# Altium PCB TE0123.V2_Placa_2022-08-20.pcbdoc (part 1 of 2)
Units mil, origin at the board's own origin, x right, y up, seen from the top; angles counter-clockwise.
Board outline 7202.22 x 3893.5 mil, 2 copper layers (Top Layer, Bottom Layer); 145 components, 165 nets, 586 pads, 199 vias.
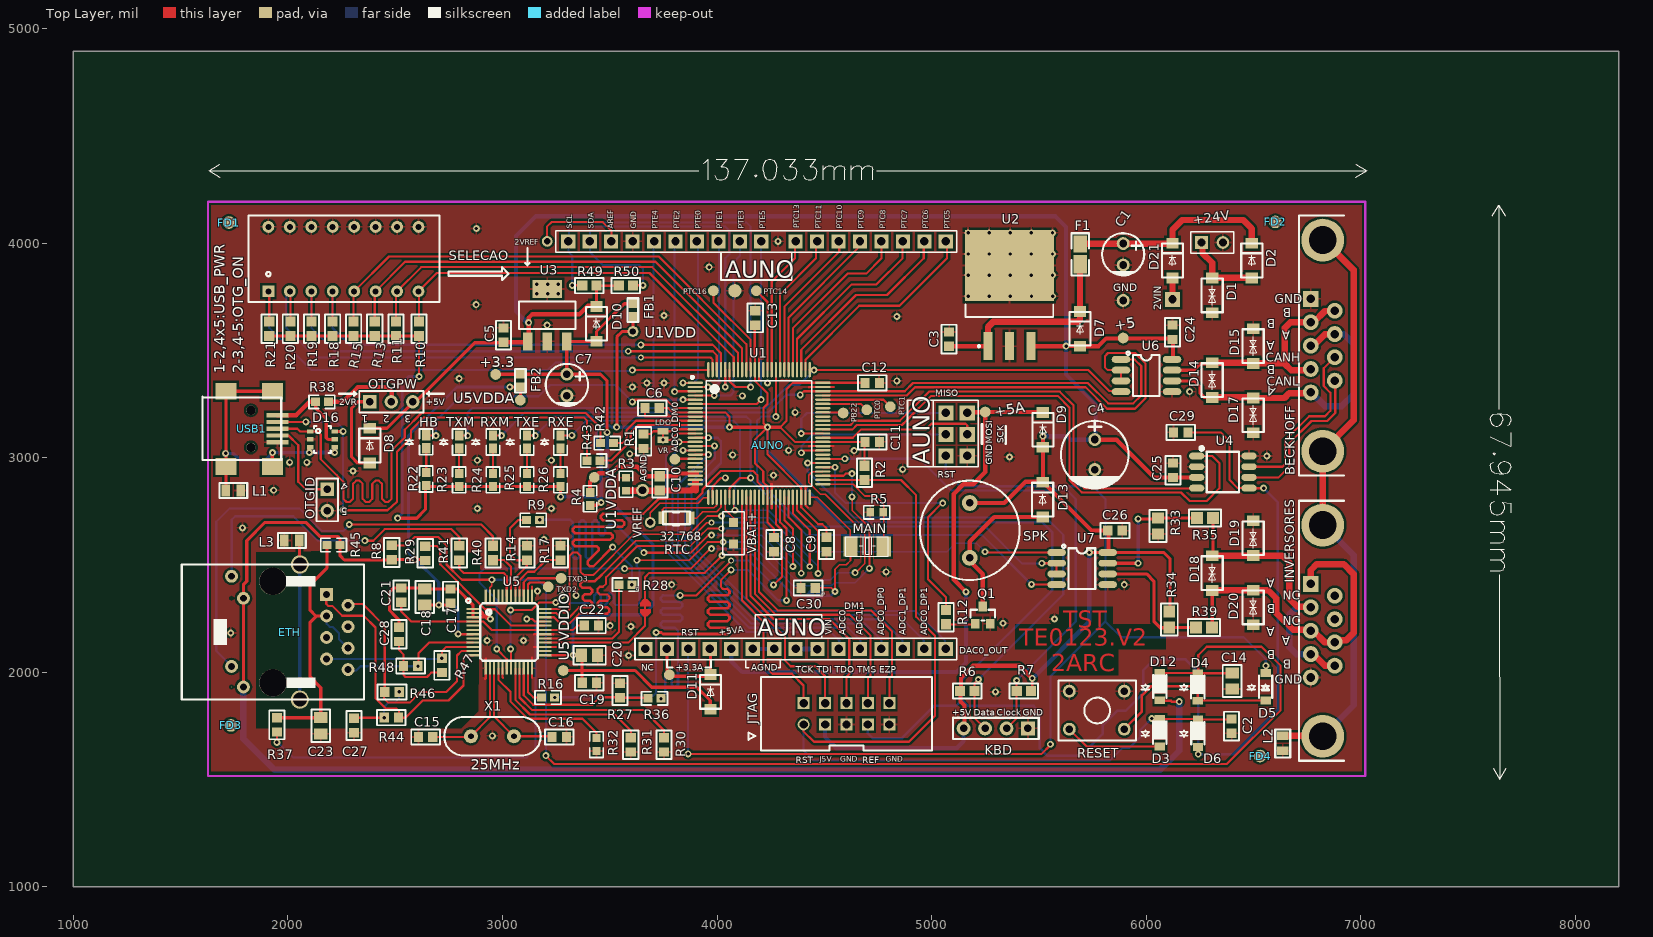
[diagram p0: Top Layer view]
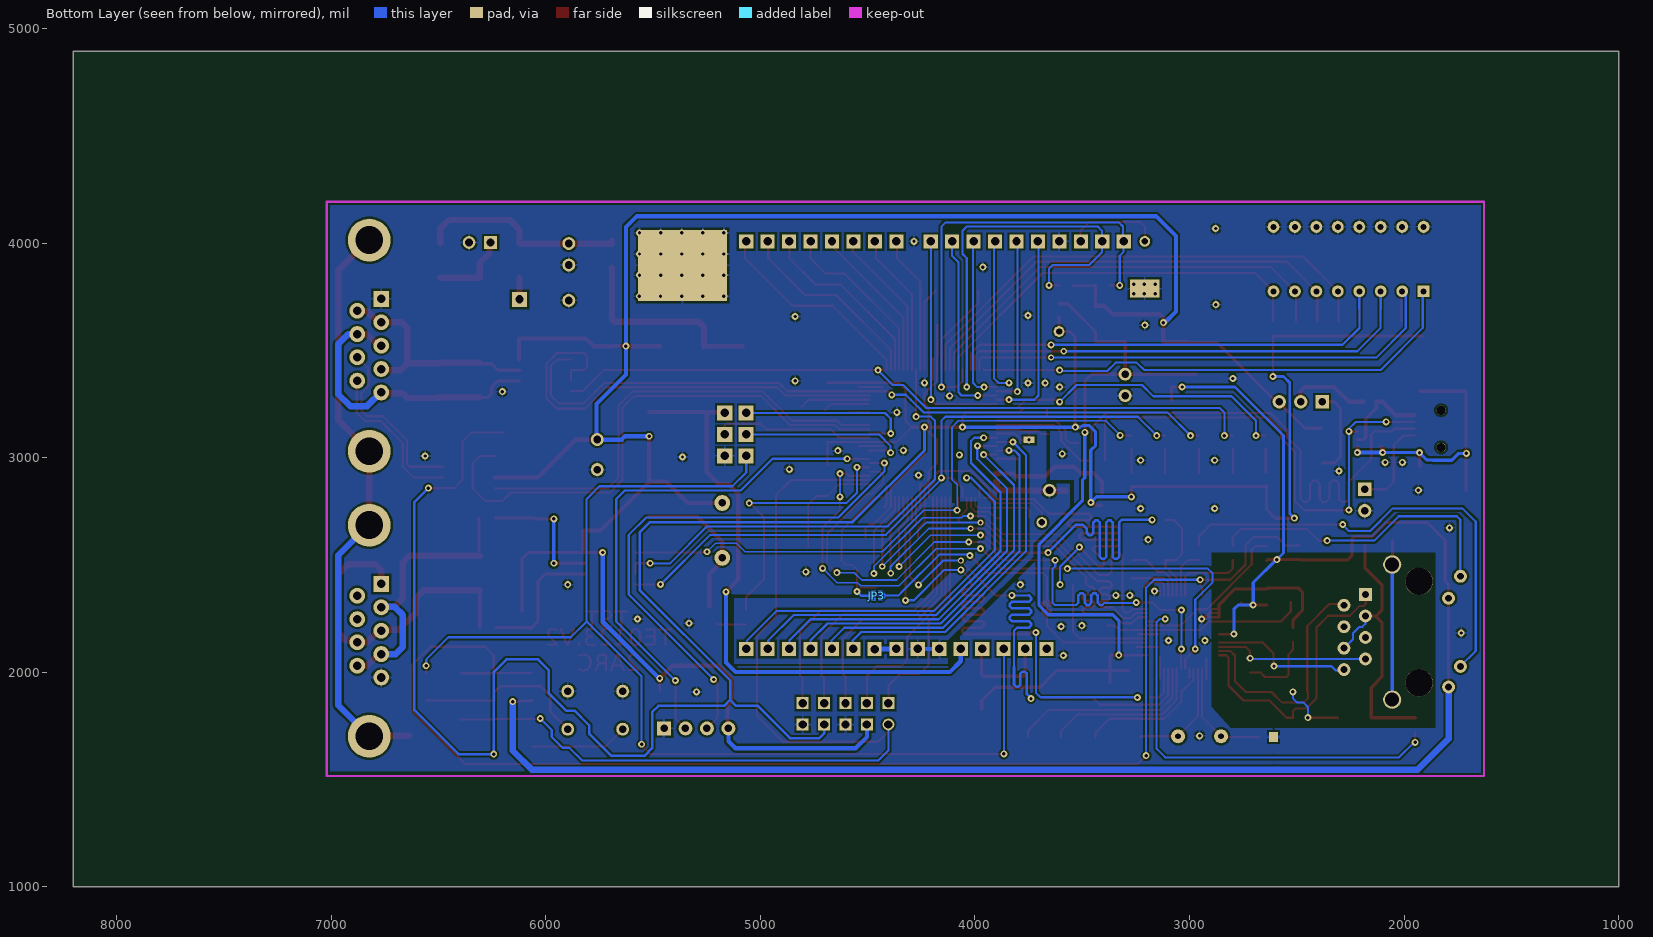
[diagram p1: Bottom Layer view, seen from below]

## Layer stack, top to bottom
Top Solder: solder mask 0.4, Solder Resist, Dk 3.5
Top Layer: signal copper 1.4
Dielectric1: dielectric 12.6, FR-4, Dk 4.8
Bottom Layer: signal copper 1.4
Bottom Solder: solder mask 0.4, Solder Resist, Dk 3.5

## Board outline
8202.22,1000 1000,1000 1000,4893.5 8202.22,4893.5

## Design rules (kind name [scope] priority, off if disabled: settings)
Clearance [All] p1: gap=10 ignorepadtopadclearanceinfootprint=FALSE except(0: Arc-Hole Track-Hole SMDPad-Hole THPad-Hole Via-Hole Fill-Hole Poly-Hole Region-Hole Text-Hole)
PolygonConnect [All] p1: connectstyle=Relief reliefconductorwidth=10 reliefentries=4 polygonreliefangle="90 Angle" airgapwidth=10
RoutingVias [All] p1: holewidth=28 width=50 viastyle="Through Hole" minholewidth=28 minwidth=50 maxholewidth=28 maxwidth=50
SolderMaskExpansion [All] p1: expansion=4 istentingtop=FALSE
Width [All] p1: maxlimit=10 minlimit=10 preferedwidth=10
30 further rules are at their usual default settings.

## Components (designator, comment, footprint, x,y, rotation, side; value= is the part's Value field where it differs from the comment)
+24V "1x2 Header" HDR1X2 6258,4003 r0 top
AUNO "ARDUINO UNO R3 WvB" "12ARDUINO UNO R3 NOSILK NOHOLES" 3966.3,3008.4 r0 top
BECKHOFF "DB9MALE" DB9_MALE 6823.3,3522.1 r270 top
C1 "10uF" CAP-D5.0XF2.0 5893,3948 r270 top
C2 "100nF" C0603#1 6398.5,1715.3 r90 top
C3 "100nF" C0603#1 5081.7,3586.1 r270 top
C4 "680uF/10V" CAP-D8.0XF3.5 5760.7,3014.3 r270 top
C5 "100nF" C0603#1 3004.9,3604.8 r270 top
C6 "100nF" C0603#1 3664.3,3230.8 r0 top
C7 "220uF/6.3V" CAP-D5.0XF2.0 3300,3339.1 r270 top
C8 "100nF" C0603#2 4264.7,2561.5 r90 top
C9 "100nF" C0603#2 4510.5,2561.6 r90 top
C10 "100nF" C0603#3 3733.2,2847 r90 top
C11 "100nF" C0603#2 4756.8,3073.4 r180 top
C12 "100nF" C0603#2 4756.8,3348.9 r180 top
C13 "100nF" C0603#2 4178,3618 r90 top
C14 "10uF" C0805 6400.5,1921.8 r90 top
C15 "33pF" C0603#4 2608,1698 r0 top
C16 "33pF" C0603#5 3298,1698 r180 top
C17 "100nF" C0603#6 2758,2388 r270 top
C18 "22uF" C0805 2638,2388 r270 top
C19 "100nF" C0603#2 3437.9,1950.6 r180 top
C20 "22uF" C0805 3368.9,2079 r0 top
C21 "100nF" C0603#6 2528,2393 r270 top
C22 "2.2uF" C0603#1 3447.8,2217.1 r180 top
C23 "10uF" C0805 2153,1713 r90 top
C24 "100nF" C0603#2 6123,3618 r270 top
C25 "100nF" C0603#1 6125.1,2974.8 r270 top
C26 "100nF" C0603#1 5888.6,2659.9 r180 top
C27 "100nF" C0603#2 2308,1718 r90 top
C28 "100nF" C0603#7 2518,2143 r90 top
C29 "100nF" C0603#6 6128,3118 r0 top
C30 "100nF" C0603#2 4391,2393 r0 top
D1 "P6SMB30CA" SMA(DO-214ACA)#1 6308,3753 r270 top
D2 "B160-13-F" SMA(DO-214AC)#1 6493,3923 r90 top
D3 "L1N4148WT1G" SOD-123 6063.6,1717.8 r270 top
D4 "L1N4148WT1G" SOD-123 6241.1,1931.3 r270 top
D5 "L1N4148WT1G" SOD-123 6557.2,1932.1 r270 top
D6 "L1N4148WT1G" SOD-123 6241.8,1715.6 r270 top
D7 "B160-13-F" SMA(DO-214AC)#1 5691.9,3604.8 r90 top
D8 "B160-13-F" SMA(DO-214AC)#2 2381.6,3060.4 r90 top
D9 "B160-13-F" SMA(DO-214AC)#2 5519,3134 r90 top
D10 "B160-13-F" SMA(DO-214AC)#1 3438,3628 r90 top
D11 "B160-13-F" SMA(DO-214AC)#1 3969.6,1912.2 r90 top
D12 "L1N4148WT1G" SOD-123 6064.2,1932.5 r270 top
D13 "B160-13-F" SMA(DO-214AC)#1 5518,2808 r90 top
D14 "B160-13-F" SMA(DO-214ACA)#2 6308,3358 r270 top
D15 "B160-13-F" SMA(DO-214ACA)#2 6498.9,3516.3 r270 top
D16 "NUP2201MR6T1G" SOT-23-6 2160.4,3085.2 r270 top
D17 "B160-13-F" SMA(DO-214ACA)#2 6498.9,3201.3 r90 top
D18 "B160-13-F" SMA(DO-214ACA)#2 6308,2458 r270 top
D19 "B160-13-F" SMA(DO-214ACA)#2 6498.9,2620.6 r270 top
D20 "B160-13-F" SMA(DO-214ACA)#2 6498.9,2305.6 r90 top
D21 "B160-13-F" SMA(DO-214AC)#1 6123,3923 r90 top
ETH "RB1-125BAG1A" RB1-125BAG1A 1930,2187 r270 top
F1 "0466.500.WR" 1206 5693,3948 r270 top
FB1 "120R" L0603 3608,3688 r270 top
FB2 "120R" L0603 3083.6,3358.8 r270 top
FD1 "FIDUCIAL" FIDUCIAL_1MM 1725,4096 r0 top
FD2 "FIDUCIAL" FIDUCIAL_1MM 6602,4099 r0 top
FD3 "FIDUCIAL" FIDUCIAL_1MM 1734,1752 r0 top
FD4 "FIDUCIAL" FIDUCIAL_1MM 6531,1609 r0 top
HB "LTST-C193KSKT-5A" 0603#1 2644.3,3103.3 r270 top
INVERSORES "DB9FEMALE" DB9 6823.3,2193.4 r270 top
JP1 "SOLDER JUMPER 2_PADS" "SOLDER JUMPER 2_PADS" 3666,2300 r90 top
JP3 "SOLDER JUMPER 2_PADS" "SOLDER JUMPER 2_PADS" 4457,2357 r0 bottom
JTAG "JTAG-PROG-CONNMOLEX" JTAG-10PIN-2.54MM-PTH 4603.3,1806.3 r0 top
KBD "2.54-1*4P_JX" H4-2.54 5299.3,1738 r270 top
L1 "330R" L0805#1 1745,2847 r180 top
L2 "330R" L0805#1 6636.7,1668.1 r270 top
L3 "330R" L0805#2 2018,2613 r0 top
MAIN "SMD-5032_2P" SMD-5032_2P 4699,2586 r0 top
OTGID "Header-Male-2.54_1x2" HDR-2X1/2.54#1 2183,2853 r0 top
OTGPW "Header-Male-2.54_1x3" HDR-3X1/2.54 2581.5,3260.3 r90 top
Q1 "S9013" Seeed-SOT-23 5239.1,2266.3 r0 top
R1 "10K" R0603#1 3658,3043 r90 top
R2 "10K" R0603#2 4687.4,2896.1 r90 top
R3 "0R" 0603#2 3575.7,2906 r270 top
R4 "0R" 0603#3 3408.6,2837.9 r270 top
R5 "0R" 0603#2 4715,2745 r0 top
R6 "10K" R0603#2 5199.7,1911.9 r180 top
R7 "10K" R0603#3 5396.5,1912 r0 top
R8 "10K" R0603#4 2483.9,2591.6 r270 top
R9 "33R" 0603#3 3113.2,2709.6 r0 top
R10 "10K" R0603#3 2611.1,3634.4 r270 top
R11 "10K" R0603#3 2503,3634.4 r270 top
R12 "1K" R0603#2 5068,2223 r90 top
R13 "10K" R0603#3 2404.6,3634.4 r270 top
R14 "1K" R0603#4 3114.5,2522 r90 top
R15 "10K" R0603#3 2306.1,3634.4 r270 top
R16 "33R" 0603#3 3241.7,1882.3 r180 top
R17 "1K" R0603#4 3270.6,2522.4 r90 top
R18 "10K" R0603#3 2208.1,3634.4 r270 top
R19 "10K" R0603#3 2109.3,3634.4 r270 top
R20 "10K" R0603#3 2010.9,3634.4 r270 top
R21 "10K" R0603#3 1912.4,3634.4 r270 top
R22 "2.2K" 0603#3 2644.4,2871 r90 top
R23 "2.2K" 0603#3 2797.9,2866.7 r90 top
R24 "4.7K" 0603#3 2955.6,2866.7 r90 top
R25 "2.2K" 0603#3 3113.8,2866.7 r90 top
R26 "4.7K" 0603#3 3270,2866.7 r90 top
R27 "1K" R0603#5 3548,1948 r270 top
R28 "33R" 0603#3 3543,2408 r0 top
R29 "4.7K" R0603#4 2640,2520.7 r90 top
R30 "1K" R0603#5 3753,1628 r90 top
R31 "1K" R0603#5 3598,1628 r90 top
R32 "6.49K" 0603#2 3438,1633 r90 top
R33 "470R" R0805#1 6056,2719 r270 top
R34 "470R" R0805#2 6108,2208 r90 top
R35 "27R" R0805#3 6311.9,2719.1 r180 top
R36 "33R" 0603#3 3738,1878 r180 top
R37 "1K" R0603#1 1948,1788 r270 top
R38 "0R" 0603#3 2187.9,3260.4 r180 top
R39 "27R" R0805#3 6308,2208 r180 top
R40 "220R" R0603#6 2956.2,2522.2 r90 top
R41 "220R" R0603#4 2798.5,2522 r90 top
R42 "33R" 0603#3 3458,3068 r0 top
R43 "33R" 0603#3 3395,2986 r0 top
R44 "49.9R" R0603#1 2448,1788 r0 top
R45 "0R" 0603#3 2183,2593 r0 top
R46 "49.9R" R0603#4 2518,1908 r180 top
R47 "49.9R" R0603#7 2718,1998 r90 top
R48 "49.9R" R0603#8 2538,2028 r0 top
R49 "10K" R0603#2 3438,3802 r180 top
R50 "10K" R0603#2 3608,3802 r180 top
RESET "6*6*12SMD Tactile Switch" "TACTILE SWITCH" 5642.3,1911.5 r0 top
RTC "SMD-3215_2P" SMD-3215_2P 3811,2719 r0 top
RXE "LTST-C193TGKT-5A" 0603#1 3270,3102.9 r270 top
RXM "LTST-C193TGKT-5A" 0603#1 2955.6,3102.9 r270 top
SELECAO "SW-DIP8" "DIP SWITCH 16" 1908.5,3775.7 r0 top
SPK "BUZZER" BUZZER-12MM-KIT 5178,2661 r90 top
TXE "LTST-C193KRKT-5A" 0603#1 3113.8,3102.9 r270 top
TXM "LTST-C193KRKT-5A" 0603#1 2797.9,3102.9 r270 top
U1 "MK64FN1M0VLL12" LQFP-100_14X14X05P 3959.6,3410 r0 top
U2 "LM2940S-5.0NOPB" TS3B 5358,3758 r0 top
U3 "LM2937IMP-3.3NOPB" SOT-223 3208,3658 r0 top
U4 "MCP2562-E/SN" SOP-8_150mil 6458,2858 r0 top
U5 "KSZ8081MLXIA" LQFP48 3029.9,2187.1 r0 top
U6 "MAX485ESA+T" SOIC-8_150mil 5908,3458 r0 top
U7 "MAX485ESA+T" SOIC-8_150mil 5608,2558 r0 top
USB1 "DS1104-B60S" MICRO-USB-13 1927.1,3134.5 r180 top
VBAT+ "Header-Male-2.54_1x2" HDR-2X1/2.54#2 4077,2698 r0 top
X1 "49S" HC49US 2952.9,1701.3 r180 top
? "" ? 4330.5,4343.8 r0 top
? "" ? 7652.11,2839.5 r0 top

## Footprints (in the part's own frame and the unit in brackets; to place one, negate y for a bottom-side part, rotate by r counter-clockwise, add the part's x,y. Pads: shape width x height; smd on the part's side, far side on the other; paste and mask are expansions set on the pad)
"12ARDUINO UNO R3 NOSILK NOHOLES" [mil]
  rect 66x66 hole 39.4: 1(1100,1000) 2(1000,1000) 3(900,1000) 4(800,1000) 5(700,1000) 6(600,1000) 7(500,1000) 8(400,1000) 9(240,1000) 10(140,1000) 11(40,1000) 12(-60,1000) 13(-160,1000) 14(-260,1000) 15(-360,1000) 16(-460,1000) 17(-560,1000) 18(-660,1000) 19(1100,-900) 20(1000,-900) 21(900,-900) 22(800,-900) 23(700,-900) 24(600,-900) 25(400,-900) 26(300,-900) 27(200,-900) 28(100,-900) 29(0,-900) 30(-100,-900) 31(-200,-900) 32(-300,-900)
  rect 70x70 hole 39.4: 33(1100,200) 34(1100,100) 35(1100,0) 36(1200,100) 37(1200,200) 38(1200,0)
0603#1 [mil]
  rect 48x38.58 smd: 1(-0.59,0) 2(60.01,0)
  silkscreen extent -31,-31 90,31
0603#2 [mil]
  rect 36.61x38.58 smd: 1(-0.59,0) 2(60.01,0)
  silkscreen extent -31,-31 90,31
0603#3 [mil]
  rect 42x38.58 smd: 1(-0.6,0) 2(60,0)
  silkscreen extent -31,-31 90,31
1206 [mm]
  rect 1.3x1.6 smd: 1(-1.6,0) 2(1.6,0)
  silkscreen extent -2.49,-1.04 2.49,1.04
BUZZER-12MM-KIT [mil]
  round 74 hole 35.4: +(128,0) -(-128,0)
  silkscreen extent -232,-232 232,232
C0603#1 [mil]
  rect 43.3x47.2 smd: 1(0,0) 2(66.9,0)
  silkscreen extent -33,-35 100,35
C0603#2 [mil]
  rect 43.3x47.2 smd: 1(-0.05,0) 2(66.85,0)
  silkscreen extent -34,-35 100,35
C0603#3 [mil]
  rect 48x47.2 smd: 1(-0.05,0) 2(66.85,0)
  silkscreen extent -34,-35 100,35
C0603#4 [mil]
  rect 43.3x47.2 smd: 1(0.15,-0.2) 2(67.05,-0.2)
  silkscreen extent -33,-36 100,35
C0603#5 [mil]
  rect 43.3x47.2 smd: 1(0.05,-0.3) 2(66.95,-0.3)
  silkscreen extent -33,-36 100,35
C0603#6 [mil]
  rect 43.3x47.2 smd: 1(0.05,0) 2(66.95,0)
  silkscreen extent -34,-35 100,35
C0603#7 [mil]
  rect 43.3x47.2 smd: 1(0.15,0.9) 2(67.05,0.9)
  silkscreen extent -33,-35 100,36
C0805 [mil]
  rect 51.2x63 smd: 1(0,0) 2(74.8,0)
  silkscreen extent -37,-43 112,43
CAP-D5.0XF2.0 [mil]
  round 60 hole 36: 1(-50,0) 2(50,0)
  silkscreen extent -98,-98 100,98
CAP-D8.0XF3.5 [mil]
  round 60 hole 36: 1(-70,0) 2(70,0)
  silkscreen extent -158,-158 160,158
DB9 [mil]
  rect 74x74 hole 40: 1(-218,-56)
  round 74 hole 40: 2(-109,-56) 3(0,-56) 4(109,-56) 5(218,-56) 6(-163,56) 7(-54,56) 8(54,56) 9(163,56)
  round 200 hole 130: G1(-492,0) G2(492,0)
  silkscreen extent -606,-110 606,100
DB9_MALE [mil]
  round 74 hole 40: 1(218,-56) 2(109,-56) 3(0,-56) 4(-109,-56) 6(163,56) 7(54,56) 8(-54,56) 9(-163,56)
  rect 74x74 hole 40: 5(-218,-56)
  round 200 hole 130: G1(-492,0) G2(492,0)
  silkscreen extent -606,-110 606,100
"DIP SWITCH 16" [mil]
  rect 55x55 hole 28: 1(0,0)
  round 55 hole 28: 2(100,0) 3(200,0) 4(300,0) 5(400,0) 6(500,0) 7(600,0) 8(700,0) 9(700,300) 10(600,300) 11(500,300) 12(400,300) 13(300,300) 14(200,300) 15(100,300) 16(0,300)
  silkscreen extent -92,-49 797,352
FIDUCIAL_1MM [mm]
  round 1.5 smd: 1(0,0)
H4-2.54 [mil]
  rect 65x65 hole 35: 1(0,150)
  round 65 hole 35: 2(0,50) 3(0,-50) 4(0,-150)
  silkscreen extent -50,-200 50,200
HC49US [mil]
  round 65 hole 27.6: 1(-100,0) 2(100,0)
  silkscreen extent -225,-90 225,90
HDR1X2 [mil]
  rect 59x59 hole 36: 1(0,0)
  round 59 hole 36: 2(100,0)
  silkscreen extent -50,-50 150,50
HDR-2X1/2.54#1 [mil]
  rect 62x62 hole 35: 1(0,0)
  round 62 hole 35: 2(0,-100)
  silkscreen extent -50,-150 50,50
HDR-2X1/2.54#2 [mil]
  rect 43.31x43.31 smd: 1(0,0) 2(0,-100)
  silkscreen extent -50,-150 50,50
HDR-3X1/2.54 [mil]
  rect 62x62 hole 35: 1(0,200)
  round 62 hole 35: 2(0,100) 3(0,0)
  silkscreen extent -50,-50 50,250
JTAG-10PIN-2.54MM-PTH [mil]
  round 55.1 hole 39.4: 1(-200,-50)
  rect 55.1x55.1 hole 39.4: 2(-199.95,49.95) 3(-99.95,-50.05) 4(-99.95,49.95) 5(0.05,-50.05) 6(0.05,49.95) 7(100.05,-50.05) 8(100.05,49.95) 9(200.05,-50.05) 10(200.05,49.95)
  silkscreen extent -457,-171 399,171
L0603 [mil]
  rect 41x41 smd: 1(-30,0) 2(30,0)
  silkscreen extent -55,-25 55,25
L0805#1 [mil]
  rect 40x55 smd: 1(-35,0) 2(35,0)
  silkscreen extent -65,-35 65,35
L0805#2 [mil]
  rect 40x55 smd: 1(-34.9,0.9) 2(35.1,0.9)
  silkscreen extent -65,-34 65,36
LQFP48 [mil]
  rect 59.1x10 smd: 1(-168.95,108) 2(-168.95,89) 3(-168.95,69) 4(-168.95,49) 5(-168.95,30) 6(-168.95,10) 7(-168.95,-10) 8(-168.95,-30) 9(-168.95,-49) 10(-168.95,-69) 11(-168.95,-89) 12(-168.95,-108) 25(169.05,-108) 26(169.05,-89) 27(169.05,-69) 28(169.05,-49) 29(169.05,-30) 30(169.05,-10) 31(169.05,10) 32(169.05,30) 33(169.05,49) 34(169.05,69) 35(169.05,89) 36(169.05,108)
  rect 10x59.1 smd: 13(-108,-169.05) 14(-89,-169.05) 15(-69,-169.05) 16(-49,-169.05) 17(-30,-169.05) 18(-10,-169.05) 19(10,-169.05) 20(30,-169.05) 21(49,-169.05) 22(69,-169.05) 23(89,-169.05) 24(108,-169.05) 37(108,168.95) 38(89,168.95) 39(69,168.95) 40(49,168.95) 41(30,168.95) 42(10,168.95) 43(-10,168.95) 44(-30,168.95) 45(-49,168.95) 46(-69,168.95) 47(-89,168.95) 48(-108,168.95)
  silkscreen extent -199,-134 134,156
LQFP-100_14X14X05P [mm]
  oval 1.8x0.28 smd: 1(-1.549,-1.549) 2(-1.549,-2.05) 3(-1.549,-2.548) 4(-1.549,-3.048) 5(-1.549,-3.548) 6(-1.549,-4.049) 7(-1.549,-4.549) 8(-1.549,-5.05) 9(-1.549,-5.55) 10(-1.549,-6.048) 11(-1.549,-6.548) 12(-1.549,-7.048) 13(-1.549,-7.549) 14(-1.549,-8.049) 15(-1.549,-8.55) 16(-1.549,-9.05) 17(-1.549,-9.548) 18(-1.549,-10.048) 19(-1.549,-10.549) 20(-1.549,-11.049) 21(-1.549,-11.549) 22(-1.549,-12.05) 23(-1.549,-12.55) 24(-1.549,-13.048) 25(-1.549,-13.548) 51(13.548,-13.548) 52(13.548,-13.048) 53(13.548,-12.55) 54(13.548,-12.05) 55(13.548,-11.549) 56(13.548,-11.049) 57(13.548,-10.549) 58(13.548,-10.048) 59(13.548,-9.548) 60(13.548,-9.05) 61(13.548,-8.55) 62(13.548,-8.049) 63(13.548,-7.549) 64(13.548,-7.048) 65(13.548,-6.548) 66(13.548,-6.048) 67(13.548,-5.55) 68(13.548,-5.05) 69(13.548,-4.549) 70(13.548,-4.049) 71(13.548,-3.548) 72(13.548,-3.048) 73(13.548,-2.548) 74(13.548,-2.05) 75(13.548,-1.549)
  oval 0.28x1.8 smd: 26(0,-15.098) 27(0.5,-15.098) 28(0.998,-15.098) 29(1.499,-15.098) 30(1.999,-15.098) 31(2.499,-15.098) 32(3,-15.098) 33(3.5,-15.098) 34(4.001,-15.098) 35(4.498,-15.098) 36(4.999,-15.098) 37(5.499,-15.098) 38(5.999,-15.098) 39(6.5,-15.098) 40(7,-15.098) 41(7.501,-15.098) 42(7.998,-15.098) 43(8.499,-15.098) 44(8.999,-15.098) 45(9.5,-15.098) 46(10,-15.098) 47(10.5,-15.098) 48(11.001,-15.098) 49(11.499,-15.098) 50(11.999,-15.098) 76(11.999,0) 77(11.499,0) 78(11.001,0) 79(10.5,0) 80(10,0) 81(9.5,0) 82(8.999,0) 83(8.499,0) 84(7.998,0) 85(7.501,0) 86(7,0) 87(6.5,0) 88(5.999,0) 89(5.499,0) 90(4.999,0) 91(4.498,0) 92(4.001,0) 93(3.5,0) 94(3,0) 95(2.499,0) 96(1.999,0) 97(1.499,0) 98(0.998,0) 99(0.5,0) 100(0,0)
  silkscreen extent -2.05,-13.8 12.25,-0.75
MICRO-USB-13 [mm]
  rect 2.5x2 smd: 0(0,4.45) 0(0,-4.45) 0(5.5,4.45) 0(5.5,-4.45)
  rect 2.6x0.5 smd: 1(-0.607,-1.61) 2(-0.607,-0.81) 3(-0.607,-0.01) 4(-0.607,0.79) 5(-0.607,1.59)
  round 1.1 hole 1.1 unplated: ""(2.54,2.2) ""(2.54,-2.2)
  silkscreen extent -1.06,-3.8 8.25,3.7
R0603#1 [mil]
  rect 43.3x47.2 smd: 1(0.05,0) 2(66.95,0)
  silkscreen extent -34,-35 100,35
R0603#2 [mil]
  rect 48x47.2 smd: 1(-0.05,0) 2(66.85,0)
  silkscreen extent -34,-35 100,35
R0603#3 [mil]
  rect 48x47.2 smd: 1(0.05,0) 2(66.95,0)
  silkscreen extent -34,-35 100,35
R0603#4 [mil]
  rect 43.3x47.2 smd: 1(0,0) 2(66.9,0)
  silkscreen extent -33,-35 100,35
R0603#5 [mil]
  rect 43.3x47.2 smd: 1(-0.05,0) 2(66.85,0)
  silkscreen extent -34,-35 100,35
R0603#6 [mil]
  rect 48x47.2 smd: 1(0,0) 2(66.9,0)
  silkscreen extent -34,-35 100,35
R0603#7 [mil]
  rect 43.3x47.2 smd: 1(0.12,0.87) 2(67.02,0.87)
  silkscreen extent -33,-35 101,36
R0603#8 [mil]
  rect 43.3x47.2 smd: 1(0.12,0.77) 2(67.02,0.77)
  silkscreen extent -33,-35 101,36
R0805#1 [mil]
  rect 51.2x55.1 smd: 1(0,0) 2(74.8,0)
  silkscreen extent -37,-39 112,39
R0805#2 [mil]
  rect 56x55.1 smd: 1(0,-0.05) 2(74.8,-0.05)
  silkscreen extent -37,-39 112,39
R0805#3 [mil]
  rect 56x55.1 smd: 1(0,0) 2(74.8,0)
  silkscreen extent -37,-39 112,39
RB1-125BAG1A [mil]
  round 1 smd: L1(255.9,-192.9) L3(-157.5,-192.9)
  round 59.84 hole 32: L1(255.9,-137.8) L3(-157.5,-137.8)
  round 60 hole 32: L2(160,-193) L4(-260,-193) R2(-125,350) R3(-75,250) R4(-25,350) R5(25,250) R6(75,350) R7(125,250) R8(175,350)
  rect 60x60 hole 32: R1(-175,250)
  round 85 hole 65: S1(-315,125) S2(315,125)
  round 127.95 hole 127.95 unplated: ""(-236.2,0) ""(236.2,0)
  silkscreen extent -315,-425 315,425
Seeed-SOT-23 [mil]
  rect 40x45 smd: 1(-35,-40) 2(35,-40) 3(0,40)
  silkscreen extent -57,-25 57,25
SMA(DO-214AC)#1 [mil]
  rect 50x57.9 smd: 1(-85,-0.05) 2(77,-0.05)
  silkscreen extent -82,-49 75,49
SMA(DO-214AC)#2 [mil]
  rect 50x57.9 smd: 1(-85,0) 2(77,0)
  silkscreen extent -82,-49 75,49
SMA(DO-214ACA)#1 [mil]
  rect 50x57.9 smd: 1(-85,-0.05) 2(77,-0.05)
  silkscreen extent -82,-49 75,49
SMA(DO-214ACA)#2 [mil]
  rect 50x57.9 smd: 1(-85,0) 2(77,0)
  silkscreen extent -82,-49 75,49
SMD-3215_2P [mil]
  rect 39.37x60 smd: 1(-65,1) 2(64.75,-0.9)
  silkscreen extent -63,-30 63,30
SMD-5032_2P [mm]
  rect 1.7x2.4 smd: 1(-1.956,0) 2(1.965,-0.001)
  silkscreen extent -2.51,-1.14 2.49,1.16
SOD-123 [mil]
  rect 35.8x48 smd: 1(64,0) 2(-64,0)
  silkscreen extent -53,-31 53,31
SOIC-8_150mil [mil]
  oval 86.61x32 smd: 1(-25,0) 2(-25,-50) 3(-25,-100) 4(-25,-150) 5(213,-150) 6(213,-100) 7(213,-50) 8(213,0)
  silkscreen extent 1,-170 155,36
"SOLDER JUMPER 2_PADS" [mil]
  Top Layer region: 7.3,24.6 24,24.6 39.8,8.9 39.8,-8.9 24,-24.6 7.3,-24.6
  Top Layer region: -6.5,-24.6 -23.2,-24.6 -39,-8.4 -39,9.4 -23.2,24.6 -6.5,24.6
SOP-8_150mil [mil]
  oval 70.87x32 smd: 1(-222,150) 2(-222,100) 3(-222,50) 4(-222,0) 5(22,0) 6(22,50) 7(22,100) 8(22,150)
  silkscreen extent -207,-20 -25,193
SOT-23-6 [mil]
  rect 20.1x31.5 smd: 1(-36.95,-56.95) 2(0.05,-56.95) 3(37.05,-56.95) 4(37.05,57.05) 5(0.05,57.05) 6(-36.95,57.05)
  silkscreen extent -63,-39 63,39
SOT-223 [mil]
  rect 43x85 smd: 1(-90,-116) 2(1,-116) 3(91,-116)
  rect 138x85 smd: 4(1,128)
  silkscreen extent -131,-58 133,70
"TACTILE SWITCH" [mil]
  round 60 hole 36: 1(0,0) 2(255.9,0) 3(0,-177.2) 4(255.9,-177.2)
  silkscreen extent -50,-230 310,50
TS3B [mil]
  rect 41.5x130.5 smd: 1(-95,-238) 2(5,-238) 3(105,-238)
  rect 413.5x331.5 smd: 4(5,138)
  silkscreen extent -200,-243 210,-43
? [mil]
  silkscreen extent -2698,-48 2698,48

## Free pads (board coordinates)
  rect 43.3x47.2 smd far side: 1(2608.05,1698)
  rect 413.5x331.5 smd far side: 1(5363.12,3896.19)
  round 60 hole 36: 2(3653,2848) 2(5893,3733)
  round 62 smd: 2(4083,3778)
  rect 138x85 smd far side: 4(3208,3788)
  rect 66x66 hole 39.4: 25(4468,2108)
  rect 70x70 hole 39.4: 38(6123,3738)
  round 50 smd: 539(2968,3388) 539(3083,3268) 539(3213,2398) 539(3273,2438) 539(3283,2008) 539(3428,2908) 539(3778,1988) 539(3803,2993) 539(3983,3778) 539(4183,3778) 539(4588,3208) 539(4698,3223) 539(4808,3238) 539(5250,3213) 539(5893,3558)
  round 50 hole 30: 539(3208,4008) 539(3608,3588) 539(3688,2698)
  rect 50x30 smd far side: 539(3748,3083)
  rect 50x30 smd: 539(3748,3083) 539(3748,3123)
  rect 62.99x51.18 smd: 554(5693,3918) 554(5693,3983)

## Via types
v1: diameter 32.28, hole 15.75, Top Layer to Bottom Layer, 193 vias
v2: diameter 28.35, hole 15.75, Top Layer to Bottom Layer, 6 vias

## Nets (pads, with @x,y where several pads share a name; then routed paths per layer and width w, separated by ;. In a path a pad name is that pad's centre, name@x,y a point inside that pad or via, vN(x,y) a via of type N, cw(c..) or ccw(c..) an arc to the next point about the centre after c; other vN are vias at no path point)
$BOARDOUTLINENET: 
+3.3V: C7.1 C19.2 C20.1 D10.1 D11.1 FB1.1 FB2.1 pad.539@2968,3388 pad.539@3283,2008 U3.3 U5.25 | length 3918.5
  Top Layer w9.84: U5.25@3198.9,2079.1 3199,2079 C20.1@3368.9,2079
  Top Layer w14.96: FB2.1@3083.6,3388.8 C7.1@3300,3389.1 ; U3.3@3299,3542 3299,3390.1 C7.1@3300,3389.1 ; v1(3329.8,2079.3) 3368.63,2079.27 C20.1@3368.9,2079 3371,2076.9 C19.2@3371.05,1950.6 ; v1(3488,3118) 3487.1,3118.9 3487.1,3261.1 3487.1,3358.8 3456.8,3389.1 C7.1@3300,3389.1
  Top Layer w15: pad.539@2968,3388 2968.8,3388.8 FB2.1@3083.6,3388.8 ; pad.539@3283,2008 3369,2008 ; U3.3@3299,3542 3437,3542 D10.1@3438.05,3543 3438,3588 3568,3718 FB1.1@3608,3718 ; 3371,2006 3369,2008 ; D11.1@3969.7,1827.2 3968,1828.8 3968,1868 3906,1930 3696,1930 3618,2008 3369,2008
  Bottom Layer w15: v1(3329.8,2079.3) 3328,2081.1 3328,2238 3358,2268 3658,2268 3701,2311 3701,2596 3498.9,2798.4 3498.9,2896 3488,2906.55 v1(3488,3118)
+3.3VA: AUNO.29 AUNO.31 D11.2 pad.539@3778,1988 | length 449.7
  Top Layer w14.96: AUNO.31@3766.3,2108.4 3766.3,1989.7 3775.2,1980.8 3961.2,1980.8 D11.2@3969.65,1989.2 3969.6,2105.1 AUNO.29@3966.3,2108.4
+5V: C4.1 C5.2 C24.2 C25.2 C26.2 D7.1 D8.2 D9.1 D10.2 D13.2 JTAG.3 KBD.4 OTGPW.3 pad.539@5893,3558 R6.2 R7.2 R34.2 R49.1 R50.2 SPK.+ U2.3 U3.1 U4.3 U6.8 U7.8 | length 11192.8
  Top Layer w9.84: R7.2@5467.19,1911.98 5469.29,1914.08 v1(5469.3,1971)
  Top Layer w12: R49.1@3438.05,3802 R50.2@3541.1,3802
  Top Layer w14.96: D8.2@2385.4,3137.4 2461.5,3137.4 2585.3,3261.4 2585.3,3260.3 2595.19,3260.28 2870.89,3535.88 3006.79,3535.88 C5.2@3008.69,3537.88 ; U7.8@5824.79,2557.98 6083.09,2557.98 6111.39,2529.68 6111.39,2283.18 R34.2@6111.79,2282.78
  Top Layer w15: D10.2@3438.05,3705 R49.1@3438.05,3802 ; v1(5735.4,2558) 5738.5,2558 U7.8@5824.8,2558
  Top Layer w19.68: C5.2@3008.69,3537.88 3117.69,3537.88 3121.79,3541.98 v1(3121.8,3629.4) ; KBD.4@5153.09,1737.98 5153.09,1844.28 5134.59,1862.68 5134.59,1909.88 5136.59,1911.88 5136.59,1972.98 5193.69,2029.98 5410.19,2029.98 v1(5469.3,1971) ; v1(5519,3100) 5519,2885.9 5744.9,2660 5825.4,2660 C26.2@5825.5,2659.9 ; v1(5627,3520) 5695.5,3520 D7.1@5695.7,3519.8 ; C4.1@5764.49,3084.28 5765.59,3083.18 5862.99,3083.18 6038.29,2907.88 6128.89,2907.88 6239.69,2907.88 U4.3@6239.79,2907.98 ; C24.2@6124.29,3555.58 6124.79,3555.08 U6.8@6124.79,3457.98
  Top Layer w20: v1(3121.8,3629.4) 3121.8,3651.8 3138,3668 3358,3668 3398,3708 3435,3708 D10.2@3438.05,3705 ; SPK.+@5178,2789 5339,2789 5438,2888 5515,2888 D13.2@5518.05,2885 ; U2.3@5466.8,3520 v1(5627,3520) ; D9.1@5519,3049 v1(5519,3100) ; D7.1@5695.7,3520 5778.1,3520 5813.7,3555.6 C24.2@6124.3,3555.6 ; U7.8@5824.8,2558 5824.8,2659.2 C26.2@5825.5,2659.9
  Bottom Layer w20: v1@3122.4,3629 3115.3,3629 3063,3681.7 3063,4033.2 3155.8,4126 5576,4126 5627,4075 v1(5627,3520) 5627,3388 5764.5,3250.5 C4.1@5764.5,3084.3 ; JTAG.3@4503.35,1756.25 4503.35,1698.65 4556,1646 5117,1646 5149,1678 5149,1737.7 KBD.4@5149.3,1738 ; v1(5469.3,1971) 5471.6,1971 5735.4,2234.8 v1(5735.4,2558) ; v1(5519,3100) 5631,3100 5647,3084 5760.4,3084 C4.1@5760.7,3084.3
+5VA: AUNO.28 AUNO.37 D9.2 pad.539@5250,3213 | length 2819.9
  Top Layer w20: v1@5160.5,2374.5 5103,2431.9 5103,2830.8 5147.7,2876 5193.9,2876 5250,2933 5250,3207 5244.9,3211.1 5169.1,3211.1 AUNO.37@5166.3,3208.4 ; pad.539@5250,3213 5517,3213 D9.2@5519,3211
  Bottom Layer w20: AUNO.28@4066.3,2108.4 4066.3,2051.3 4117,2000.5 5115.6,2000.5 5160.3,2045.5 v1@5160.5,2374.5
  other v1: 5160.4,2374.6
ADC0_DM1: AUNO.24 U1.15 | length 1631
  Top Layer w9.84: v1(3823,3073) 3823,3073.4 U1.15@3898.6,3073.4
  Bottom Layer w10: v1(3823,3073) 3762.7,3012.7 3762.7,2563.1 4138.6,2187.5 4530.7,2187.5 4569.8,2148.1 4569.8,2111.9 AUNO.24@4566.3,2108.4
ADC0_DP0/ADC1_DP3: AUNO.22 U1.18 | length 1728.2
  Top Layer w9.84: U1.18@3898.6,3014.4 v1(3959.6,3014.3)
  Bottom Layer w10: v1(3959.6,3014.3) 3818,2872.7 3818,2568.1 4158.9,2226.9 4687.5,2226.9 4766.5,2148.5 AUNO.22@4766.3,2108.4
ADC0_DP1: AUNO.20 U1.14 | length 1992
  Top Layer w9.84: U1.14@3898.6,3093.1 v1(3959.6,3093)
  Bottom Layer w10: v1(3959.6,3093) 4003,3093 4011.9,3084.1 4018.6,3077.4 4018.6,2974.9 3881,2837.3 3881,2565 4179.7,2266.3 4845.4,2266.3 4963.5,2148.2 4963.5,2111.2 AUNO.20@4966.3,2108.4
ADC1_DM1: AUNO.23 U1.17 | length 1651.4
  Top Layer w9.84: v1(3841.5,3034) U1.17@3898.6,3034.1
  Bottom Layer w10: v1(3841.5,3034) 3815.9,3034 3792.2,3010.1 3792.2,2563.8 4148.8,2207.2 4609.1,2207.2 4668.2,2148.2 4668.2,2110.3 AUNO.23@4666.3,2108.4
ADC1_DP1: AUNO.21 U1.16 | length 1864.9
  Top Layer w9.84: U1.16@3898.6,3053.7 3988,3053.7 v1(3988,3055)
  Bottom Layer w10: v1(3988,3055) 3988,3044.9 3989.1,3043.8 3989.1,2995 3851.3,2856.8 3851.3,2564.6 4169.5,2246.6 4766.7,2246.6 4865.1,2148.1 4865.1,2110 AUNO.21@4866.3,2108.4
AGND: AUNO.26 AUNO.27 C10.1 pad.2@3653,2848 R3.2 U1.24 U1.25 | length 472.4
  Top Layer w9.84: U1.25@3898.6,2876.6 U1.24@3898.6,2896.3
  Top Layer w29.53: R3.2@3575.7,2845.99 3722.4,2845.8 C10.1@3733.2,2846.95 3881,2847.1 3900.5,2866.7 3900.52,2846.98
  Bottom Layer w19.68: AUNO.27@4166.3,2108.4 AUNO.26@4266.3,2108.4
C21_2: C21.2 C22.2 U5.4 U5.31 | length 940
  Top Layer w9.84: U5.4@2860.9,2236.1 2910.1,2236.1 2948.9,2197.1 3198.9,2197.1 3329.38,2197.1 3349.34,2217.06 3380.86,2217.06 C22.2@3380.9,2217.1
  Top Layer w10: C21.2@2528,2326.05 2528,2283 2575,2236 U5.4@2861,2236
CAN0_RX: U1.65 U4.4 | length 2192.4
  Top Layer w10: U1.65@4493,3152.2 4622.1,3152.2 4633.2,3163.2 4642,3172 4852,3172 4987.9,3308 5598.2,3308 5662.3,3243.4 5662.3,2906 5711.5,2857 6234.8,2857 U4.4@6236,2858
CAN0_TX: U1.64 U4.1 | length 2575.3
  Top Layer w10: U1.64@4493,3132 4632.1,3132 4651.9,3152 4862,3152 4886.2,3176.1 4887.8,3178 4998,3288 5587.8,3288 5643,3233 5643,2896 5700,2839 5700.5,2838 6163,2838 6203,2798 6283.1,2798 6341.5,2856.8 6341.5,2974.9 6308.8,3007.6 U4.1@6236,3007.6
CHASSI_RS485: BECKHOFF.G1 BECKHOFF.G2 INVERSORES.G1 INVERSORES.G2 L2.1 | length 2744.3
  Top Layer w29.53: L2.1@6636.7,1703.1 6821.6,1703.1 INVERSORES.G2@6823.3,1701.4
  Top Layer w30: INVERSORES.G1@6823.3,2685.4 BECKHOFF.G2@6823.3,3030.1 6967,3173.8 6967,3875 6827.9,4014.1 BECKHOFF.G1@6823.3,4014.1
  Bottom Layer w30: INVERSORES.G2@6823.3,1701.4 6968,1846.1 6968,2545.2 6827.8,2685.4 INVERSORES.G1@6823.3,2685.4
D2_1: +24V.1 D1.1 D2.1 | length 370.7
  Top Layer w30: +24V.1@6258,4003 6263,3998 6263,3953 6308,3908 D1.1@6307.95,3838 D2.1@6493.05,3838
D2_2: C1.1 D2.2 D21.2 F1.1 pad.554@5693,3983 | length 980
  Top Layer w30: F1.1@5693,4011 5693,3998 C1.1@5893,3998 6121,3998 D21.2@6123.05,4000 6123,4063 6168,4108 6453,4108 6493,4068 D2.2@6493.05,4000
D16_1: D16.1 R42.1 USB1.3 | length 2516.8
  Top Layer w10: USB1.3@1951,3134.9 2043.3,3134.9 2056.4,3121.8 2103,3121.8 D16.1@2103.45,3122.15 2138,3123 2153,3108 2153,2993 2228,2918 2258,2888 2258,2878 2258,2808 2273,2793 2288,2793 2303,2808 2303,2878 2318,2893 2333,2893 2348,2878 2348,2808 2363,2793 2378,2793 2393,2808 2393,2878 2408,2893 2423,2893 2438,2878 2438,2808 2453,2793 2468,2793 2483,2808 2483,3033 2493,3043.8 2544,3094 2544,3098.6 2544,3130 2622,3208 3388,3208 3457.4,3138.6 R42.1@3457.4,3068
D16_5: D16.5 R38.2 USB1.1 | length 433.6
  Top Layer w14.96: R38.2@2127.9,3260.4 2128.9,3259.4 2128.9,3230.8 2178.1,3181.6 2178.1,3093 2185.9,3085.2 D16.5@2217.45,3085.15
  Top Layer w20: USB1.1@1951,3197.9 1951.1,3197.8 2037.9,3197.8 2100.6,3260.4 R38.2@2127.9,3260.4
D16_6: D16.6 R43.1 USB1.2 | length 2403.4
  Top Layer w10: USB1.2@1951,3166.4 2082.4,3166.4 v1(2083,3167) ; v1@2257,2755 2423.4,2755 2464,2755 2508,2794.1 2508,3028 2574,3094 2574,3129 2633,3188 3378,3188 3394.4,3171.6 R43.1@3394.4,2986
  Top Layer w14.96: D16.6@2217.45,3122.15 2256.4,3122.2 v1(2256.8,3122.6)
  Bottom Layer w10: v1(2083,3167) 2083,3166 2225,3166 2256.8,3134.2 v1(2256.8,3122.6) 2257,3122.4 v1(2257,2756)
DAC0_OUT/CMP1_IN3/ADC0_SE23: AUNO.19 U1.27 | length 1899.7
  Top Layer w9.84: U1.27@3979.3,2815.6 3979.3,2866.7 4018.6,2906 v1(4038.5,2906.1)
  Bottom Layer w10: v1(4038.5,2906.1) 4018.7,2906.1 3908,2795.4 3908,2568 4190.1,2286 4924.1,2286 5061.9,2148.2 5061.9,2112.8 AUNO.19@5066.3,2108.4
ETH_L1: C17.2 C18.2 D12.1 ETH.L1@1792.2,1931.1 ETH.L3@1792.2,2344.5 FB2.2 pad.539@3083,3268 R8.2 R29.1 R45.2 U5.7 | length 8630.8
  Top Layer w10: v1(2793,2178) 2793.9,2177.1 U5.7@2860.95,2177.1
  Top Layer w12: D12.1@6064.2,1868.5 6065.7,1867 6115,1867 6119.3,1862.7 v1(6154.5,1862.7)
  Top Layer w14.96: ETH.L1@1792.2,1931.1 1792.2,2293.3 ETH.L3@1792.2,2344.5 ; v1(3034.4,3329.3) FB2.2@3083.6,3328.8
  Top Layer w15: ETH.L3@1792.2,2344.5 1792.2,2407.2 1808,2423 1808,2613 1893,2698 2083,2698 2148,2633 2231,2633 2243,2621 R45.2@2243,2593 2243,2543 2263,2523 2482.2,2523 R8.2@2483.9,2524.7 v1(2593,2524.7) 2636,2524.7 R29.1@2640,2520.7 ; C18.2@2638,2313.2 v1(2703,2313.2) 2750.15,2313.2 C17.2@2758,2321.05 ; pad.539@3083,3268 3083.6,3268.6 FB2.2@3083.6,3328.8
  Bottom Layer w13: v1(2593,2524.7) 2561.9,2555.8 2561.9,2728.9 2561.9,3102.9 2787.9,3328.8 v1(3034.4,3329.3)
  Bottom Layer w15: v1(2593,2524.7) 2596.3,2524.7 2703,2418 v1(2703,2313.2) 2772.8,2313.2 2793,2293 v1(2793,2178)
  Bottom Layer w30: ETH.L1@1792.2,1931.1 1792.2,1689.8 1938,1544 1938,1545 6065,1545 6154.5,1634.5 v1@6154.6,1863
ETH_L2: ETH.L2 R40.2 | length 2144.4
  Top Layer w10: v1(2285.6,2688.3) 2900.5,2688.3 2956,2632.8 2956,2589.3 R40.2@2956.2,2589.1
  Bottom Layer w9.84: ETH.L2@1737,2027 1665.5,2098.5 1665.5,2701.3 1728.1,2763.9 2051.7,2763.9 2157.6,2658 2256.8,2658 2285.6,2686.8 v1(2285.6,2688.3)
ETH_L4: ETH.L4 R41.2 | length 1458.3
  Top Layer w10: v1(2358,2613) 2397.2,2613 2451.2,2667 2762.4,2667 2798.9,2630.4 R41.2@2798.5,2588.9
  Bottom Layer w9.84: ETH.L4@1737,2447 1738,2448 1738,2710.8 1753.7,2727 2025.3,2727 2139.3,2613 v1(2358,2613)
ETH_R1: ETH.R1 R44.2 U5.12 | length 1358.7
  Top Layer w10: ETH.R1@2180,2362 2178,2360 2178,2319 2189,2308 2208,2308 2253,2263 2353,2263 2408,2208 2408,1878 2455,1831 2505,1831 2518,1818 2518,1791.1 2514.9,1788 2548,1788 2628,1868 2748,1868 2818,1938 2818,2068 2829.1,2079.1 U5.12@2860.9,2079.1
ETH_R2: ETH.R2 R46.2 U5.11 | length 1145.5
  Top Layer w10: ETH.R2@2280,2312 2286,2318 2348,2318 2451.1,2214.9 R46.2@2451.1,1908 2448,1904.9 2448,1878 2468,1858 2568,1858 2618,1908 2738,1908 2788,1958 2788,2078 2808.1,2098.1 U5.11@2860.95,2098.1
ETH_R6: C23.2 ETH.R3 ETH.R6 R37.1 R45.1 | length 1335.4
  Top Layer w15: R37.1@1948,1787.95 1948.2,1787.8 C23.2@2153,1787.8 2153,1928 2103,1978 2103,2233 2129,2259 2129,2262 ; ETH.R3@2180,2262 2129,2262 ; R45.1@2182.4,2593 2182.4,2487.4 2103,2408 2103,2288 2129,2262
  Bottom Layer w10: ETH.R3@2180,2262 2180,2226 2194.3,2211.5 2207.2,2211.5 2238,2180.8 2238,2154 ETH.R6@2280,2112
ETH_R7: ETH.R7 R47.2 U5.10 | length 724.7
  Top Layer w10: v1(2717,2065) 2718,2066 2718,2098 2738.1,2118.1 U5.10@2860.95,2118.1
  Bottom Layer w10: ETH.R7@2180,2062 2717,2062 v1(2717,2065)
ETH_R8: ETH.R8 R48.2 U5.9 | length 670.5
  Top Layer w10: v1(2606,2028) 2608,2030 2608,2088 2658.1,2138.1 U5.9@2860.95,2138.1
  Bottom Layer w10: ETH.R8@2280,2012 2284,2008 2318,2008 2338,2028 v1(2606,2028)
ETH_S1: ETH.S1 ETH.S2 L3.2 | length 742.7
  Top Layer w15: L3.2@2053.1,2613.9 2053.1,2503.9 ETH.S1@2055,2502
  Bottom Layer w14.96: ETH.S2@2055,1872 ETH.S1@2055,2502
EZP_CS_B: JTAG.10 U1.38 | length 1476.9
  Top Layer w10: U1.38@4195.8,2816 4195.8,2375 4283,2288 4718,2288 4816,2190 4816,1986.6 4803.4,1973.6 JTAG.10@4803.4,1856
GND: +24V.2 AUNO.15 AUNO.38 BECKHOFF.5 C1.2 C2.1 C3.1 C4.2 C5.1 C6.1 C7.2 C8.1 C9.1 C11.1 C12.1 C13.2 C14.1 C15.1 C16.1 C17.1 C18.1 C19.1 C20.2 C21.1 C22.1 C23.1 C24.1 C25.1 C26.1 C27.1 C28.2 C29.1 C30.1 D1.2 D15.1 D16.2 D17.1 D19.1 D20.1 INVERSORES.5 JTAG.5 JTAG.9 KBD.1 L1.1 L2.2 L3.1 OTGID.2 pad.1 pad.2@4083,3778 pad.2@5893,3733 pad.4 Q1.2 R1.1 R3.1 R5.1 R14.2 R17.2 R27.1 R30.1 R31.1 R32.1 R33.2 RESET.1 RESET.2 SELECAO.9 SELECAO.10 SELECAO.11 SELECAO.12 SELECAO.13 SELECAO.14 SELECAO.15 SELECAO.16 U1.9 U1.41 U1.49 U1.60 U1.74 U1.88 U2.2 U2.4 U3.2 U3.4 U4.2 U4.8 U5.1 U5.2 U5.3 U5.13 U5.17 U5.24 U5.27 U5.30 U5.37 U6.5 U7.5 USB1.5 VBAT+.2 | length 2282.6
  Top Layer w10: U5.3@2860.95,2256.1 2916.21,2256.1 2918.05,2257.95 2928,2263 v1(2943,2248) 2928,2248 2899.9,2276.1 U5.2@2860.95,2276.1 ; U5.1@2860.95,2295.1 2890.9,2295.1 2908,2278 2908,2275.48 2923.02,2260.47 ; 2918,1968 2921.9,1971.9 2921.9,2018.1 2921.9,2061.9 2923,2063 ; U5.17@2999.9,2018.1 2999.9,1976.1 3003,1973 ; U5.37@3137.9,2356.1 3138,2398 ; 3138,1973 3137.9,2018.1 3138,2068 ; 3148,2118 3198.9,2118.1 3248,2118 ; 3148,2177 3198.9,2177.1 3238,2177 ; C6.1@3664.3,3230.8 3664.3,3191.5 U1.9@3898.6,3191.5 3949.5,3191.5 3953,3188 ; 4198,3363 4195.8,3365.2 U1.88@4195.8,3410 4195.8,3460.8 4198,3463 ; 4253,2878 4254.9,2876.1 U1.41@4254.9,2815.6 4255,2764 ; 4413,2866 U1.49@4412.3,2815.6 4412.3,2778.7 4423,2768 ; 4428,3053 U1.60@4493,3053.7 4542,3054 ; 4428,3328 4429.3,3329.3 U1.74@4493,3329.3 4545,3329
  Top Layer w15: C28.2@2517.1,2210.05 2517.1,2243.9 2503,2258 2473,2288 2473,2373 2493,2393 2527.9,2393 2528,2392.9 2584.4,2392.9 2633.1,2392.9 C18.1@2638,2388 C17.1@2758,2387.95 C17.1@2758,2387.95 ; C17.1@2758,2387.95 2788,2388 2863,2313 2863,2297.1 U5.1@2860.95,2295.1 ; U5.3@2863,2260 U5.2@2863,2280 ; U5.2@2863,2276 U5.1@2863,2295
  other v1: 2953,1703 5298,1908 3588,2078 2928,2148 3098,2148 1733,2183 3598,2213 3502,2217 5333,2228 5573,2248 3278,2358 3343,2358 3163,2378 3788,2408 5898,2408 4788,2468 3193,2618 1788,2673 2883,2763 3228,2763 1933,2848 4263,2918 2303,2938 4865,2945.6 2008,2978 2088,2978 2883,2988 3228,2988 5363,3003 6563,3008 4073,3013 3593,3018 4639,3033 4333.5,3034.1 4363.7,3211.1 4118,3288 6203,3308 3605.1,3329.3 3673,3348 3753,3348 4235.1,3349 4838,3358 2798,3368.9 3208,3618 4838,3658 3753,3663 2876.8,3713.1 5170.3,3752.4 5268.7,3752.4 5367.1,3752.4 5465.6,3752.4 5564,3752.4 3160,3764 3210,3764 3260,3764 3160,3809 3210,3809 3260,3809 5170.2,3850.9 5268.6,3850.9 5367,3850.9 5465.4,3850.9 5563.9,3850.9 3963,3888 5170.2,3949.4 5268.6,3949.4 5367,3949.4 5465.4,3949.4 5563.9,3949.4 4284.3,4008.5 5170.1,4047.8 5268.5,4047.8 5366.9,4047.8 5465.3,4047.8 5563.8,4047.8 2878,4068
INVERSORES_1: D18.2 D20.2 INVERSORES.1 INVERSORES.3 INVERSORES.8 R39.1 | length 1561
  Top Layer w14.96: R39.1@6308,2208 D18.2@6308,2381
  Top Layer w30: D18.2@6308,2381 6497.3,2381 D20.2@6498.9,2382.6 6569.6,2382.6 6607.2,2345 6607.2,2276.1 6685.9,2197.4 6763.3,2197.4 INVERSORES.3@6767.3,2193.4 6778.5,2193.4 6833.6,2138.3 6878.2,2138.3 INVERSORES.8@6879.3,2139.4 6888.1,2148.2 6932,2148.2 6967,2183 6967,2457.7 6922.2,2502.5 6794.2,2502.5 6767.3,2475.6 INVERSORES.1@6767.3,2411.4
INVERSORES_2: D18.1 D19.2 INVERSORES.2 INVERSORES.4 INVERSORES.9 R35.1 | length 1351.4
  Top Layer w14.96: D18.1@6308,2543 6311.9,2546.9 R35.1@6311.9,2719.1
  Top Layer w30: D18.1@6308,2543 6498.3,2543 D19.2@6498.9,2543.6 6635,2543.6 6666.3,2512.3 6666.3,2345 6705.6,2305.6 6764.1,2305.6 INVERSORES.2@6767.3,2302.4 ; INVERSORES.4@6767.3,2084.4 6779.2,2084.4 6833.6,2030 6879,2030 INVERSORES.9@6879.3,2030.4
  Bottom Layer w30: INVERSORES.4@6767.3,2084.4 6700.5,2084.4 6666.3,2118.6 6666.3,2266.3 6705.6,2305.6 6764.1,2305.6 INVERSORES.2@6767.3,2302.4
L1_2: D16.3 D16.4 L1.2 USB1.0 | length 1391.3
  Top Layer w14.96: v1(1709.5,3019.9) 1710.6,3018.8 USB1.0@1710.57,2959.3 USB1.0@1710.57,3309.7 USB1.0@1927.1,3309.68 ; L1.2@1710,2847 1710.5,2847.5 USB1.0@1710.5,2959.3 ; USB1.0@1927.1,2959.32 1927.1,3023.1 v1(1927.7,3023.7)
  Top Layer w19.68: v1(2099.3,3024.1) 2099.3,3044.1 D16.3@2103.45,3048.15 ; D16.4@2217.45,3048.15 2217.4,3024.2 v1(2217.5,3024.1)
  Bottom Layer w14.96: v1(1709.5,3019.9) 1744.92,3019.9 1776.9,2987.92 1865.48,2987.92 1866.27,2988.71 1892.71,2988.71 v1(1927.7,3023.7) 1928.1,3024.1 v1(2099.3,3024.1)
  Bottom Layer w19.68: v1(2099.3,3024.1) v1(2217.5,3024.1)
PS2_CLOCK: KBD.2 R7.1 U1.57 | length 2460.1
  Top Layer w9.84: U1.57@4493,2994.7 4595,2994.7 v1@4595,2995 ; KBD.2@5349.93,1738.14 5396.53,1784.74 R7.1@5396.53,1912.04 ; R7.1@5396.5,1912 5396.5,1961 v1(5396.6,1961.1)
  Bottom Layer w10: v1@4595,2995 4943.5,2995 5091.5,2847 5632.8,2847 5672.2,2807.6 5672.2,2236.7 v1(5396.6,1961.1)
  other v1: 4596,2995
PS2_DATA: KBD.3 R6.1 U1.56 | length 2518.7
  Top Layer w9.84: v1(4422.2,2974.9) U1.56@4493,2975 ; R6.1@5199.73,1911.94 5199.73,1788.34 KBD.3@5249.93,1738.14
  Top Layer w10: R6.1@5199.75,1911.9 5199.75,1947.75 v1(5218,1966)
  Bottom Layer w10: v1(4422.2,2974.9) 4422.2,2935.5 4636.8,2721 5533,2721 5614,2640 5614,2362 v1(5218,1966)
PTA5: R28.2 U1.39 | length 2344.3
  Top Layer w10: 3655.8,2738 3726.9,2807 3903,2807 3932,2836 3932,2852 4018,2938 4168,2938 4188,2918 4188,2888 4215,2861 U1.39@4215,2815.6
  Top Layer w12: v1(3513,2583) 3423,2493 3408,2493 3398,2503 3398,2518 3448,2568 3448,2578 3438,2588 3338,2588 3328,2598 3328,2608 3338,2618 3503,2618 3513,2628 3513,2638 3503,2648 3338,2648 3328,2658 3328,2668 3338,2678 3498,2678 3558,2678 3568,2688 3568,2698 3558,2708 3468,2708 3458,2718 3458,2728 3468,2738 3598,2738 3655.8,2738 3655,2738
  Bottom Layer w10: v1(3513,2583) 3603,2493 v1(3603,2408)
PTA12: R36.1 U1.42 | length 2185
  Top Layer w10: R36.1@3738.6,1878 3739,1877.6 v1(3739,1877) ; v1(3828,2358) 3904,2358 v2(4066,2520) ; v1(4263,2407) 4265,2407 4303,2445 4303,2661.1 4274.5,2689.5 U1.42@4274.5,2816
  Bottom Layer w10: v1(3739,1877) 3739,1879 3758,1898 ; 3748,2358 v1(3828,2358) ; 3803,2208 3818,2193 3818,2023 ; v2(4066,2520) 4148.7,2520 4261.7,2407 v1(4263,2407)
  Bottom Layer w12: v1@3738,1878 3758,1898 3758,1993 3768,2003 3778,2003 3788,1993 3788,1953 3788,1943 3798,1933 3808,1933 3818,1943 3818,2023 ; 3748,2358 3738,2348 3738,2338 3748,2328 3828,2328 3838,2318 3838,2308 3828,2298 3748,2298 3738,2288 3738,2278 3748,2268 3828,2268 3838,2258 3838,2248 3828,2238 3748,2238 3738,2228 3738,2218 3748,2208 3803,2208